# Altium PCB PCB.PcbDoc (part 2 of 2)
Units mil, origin at the board's own origin, x right, y up, seen from the top; angles counter-clockwise.
Board outline 2019.68 x 789.37 mil, 4 copper layers (Top Layer, Power Layer, GND Layer, Bottom Layer), stack 60.473 mil thick; 81 components, 59 nets, 315 pads, 114 vias.
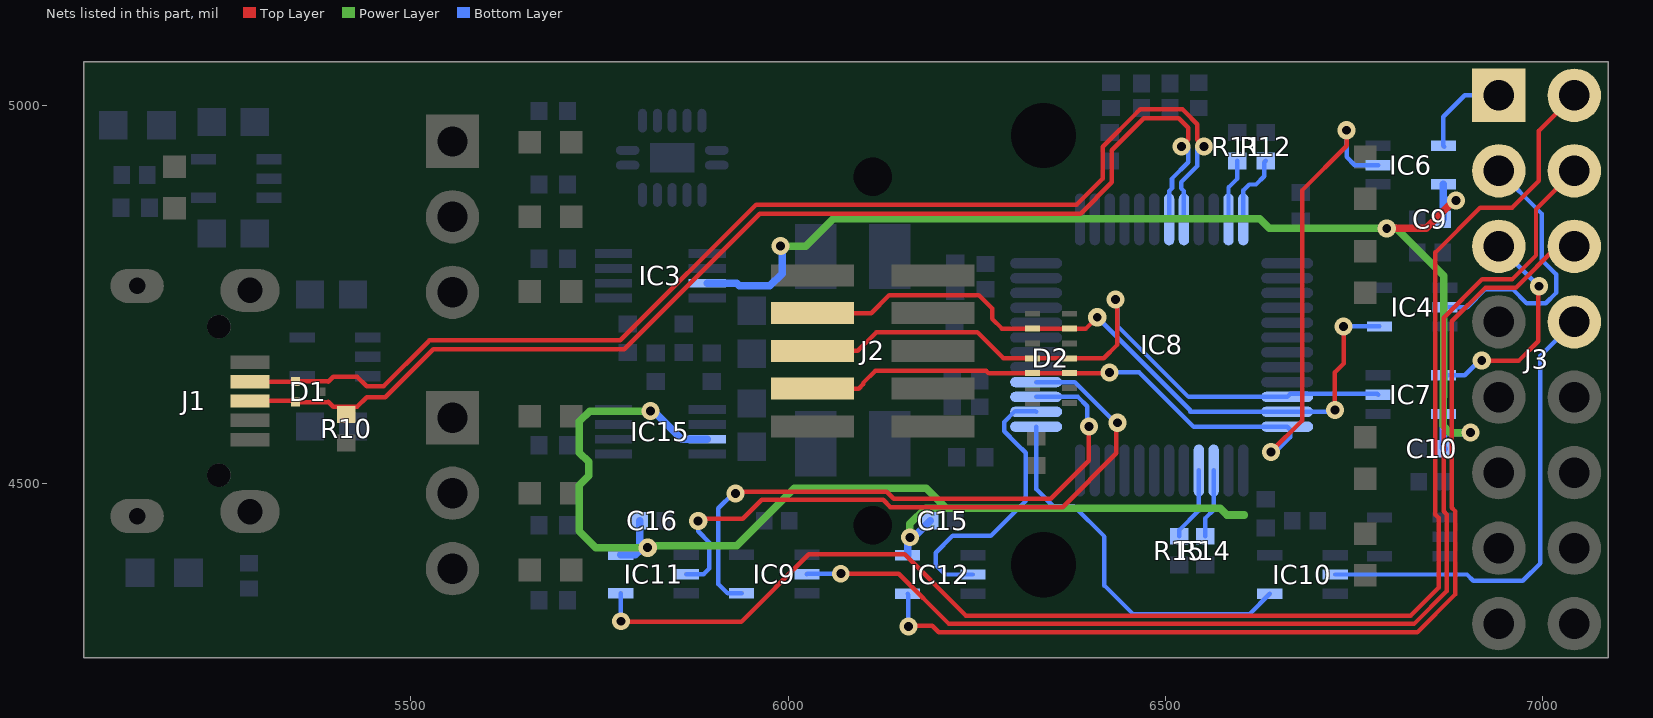
[diagram p4: the nets of this part, all layers, seen from the top]

## Via types
v1: diameter 24.02, hole 11.81, Top Layer to Bottom Layer, tented both sides, 100 vias
v2: diameter 24.02, hole 11.81, Top Layer to Bottom Layer, 11 vias
v3: diameter 23.62, hole 11.81, Top Layer to Bottom Layer, tented both sides, 3 vias

## Nets (pads, with @x,y where several pads share a name; then routed paths per layer and width w, separated by ;. In a path a pad name is that pad's centre, name@x,y a point inside that pad or via, vN(x,y) a via of type N, cw(c..) or ccw(c..) an arc to the next point about the centre after c; other vN are vias at no path point) (continued)
UART_1_RTS: D2.11 IC7.2 IC8.22 J2.6 | length 918.6
  Top Layer w5.91: J2.6@6032.2,4675.2 6092.52,4675.2 6117.13,4699.8 6250.98,4699.8 6285.43,4665.35 D2.11@6323.82,4665.35 6418.31,4665.35 6436.02,4683.07 6436.02,4741.14 v1(6434.06,4743.11)
  Bottom Layer w5.91: v1(6434.06,4743.11) 6436.02,4741.14 6436.02,4708.88 6530.73,4614.17 IC8.22@6661.42,4614.17 6665.35,4618.11 6780.81,4618.11 IC7.2@6781.81,4617.11
UART_1_RTS_T: IC7.4 J3.5 | length 285.6
  Top Layer w5.91: v1(6919.29,4662.4) 6968.5,4662.4 6994.09,4687.99 6994.09,4759.84 v1(6995.08,4760.83)
  Bottom Layer w5.91: IC7.4@6868.43,4642.7 6896.64,4642.7 v1@6913.39,4659.45 ; J3.5@6941.93,4813.78 6994.88,4760.83 v1(6995.08,4760.83)
UART_1_RXD: D2.9 IC4.4 IC8.23 J2.8 | length 961.4
  Top Layer w5.91: J2.8@6032.2,4725.2 6110.04,4725.2 6133.86,4749.02 6252.95,4749.02 6270.59,4731.38 6270.59,4717.52 6283.39,4704.72 D2.9@6323.82,4704.72 6394.77,4704.72 v1(6409.76,4719.72) ; v1(6724.74,4596.68) 6724.74,4593.83 6724.41,4593.5 6724.41,4646.65 6736.22,4658.46 v1(6736.22,4707.68)
  Bottom Layer w5.91: v1(6409.76,4719.72) 6533.13,4596.35 6533.13,4594.5 IC8.23@6661.42,4594.49 6722.44,4594.49 6723.43,4593.5 6724.41,4593.5 6724.74,4593.83 v1(6724.74,4596.68) ; v1(6736.22,4707.68) 6783.64,4707.68 IC4.4@6783.78,4707.53
UART_1_RXD_T: IC4.2 J3.3 | length 363.8
  Bottom Layer w5.91: IC4.2@6870.39,4733.12 6899.92,4733.12 6923.96,4757.17 6959.9,4757.17 6978.61,4738.45 7004.2,4738.45 7017.72,4751.97 7017.72,4776.64 6998.54,4795.81 6998.54,4857.17 J3.3@6941.93,4913.78
UART_1_RXLED: IC8.12 R12.1 | length 95
  Bottom Layer w5.91: IC8.12@6603.35,4849.41 6603.35,4887.8 6611.22,4895.67 6620.08,4895.67 6630.91,4906.5 6630.91,4925 R12.1@6632.87,4926.97
UART_1_TXD: D2.12 IC6.2 IC8.24 J2.4 | length 1269.6
  Top Layer w5.91: J2.4@6032.2,4625.2 6093.7,4625.2 6099.43,4630.93 6099.43,4632.51 6115.55,4648.62 6262.8,4648.62 6265.75,4645.67 D2.12@6323.82,4645.67 6425.2,4645.67 v1(6426.18,4646.65) ; v1(6639.76,4541.34) 6681.1,4582.68 6681.1,4887.8 6740.16,4946.85 v1(6740.16,4967.52)
  Bottom Layer w5.91: v1(6426.18,4646.65) 6465.55,4646.65 6537.4,4574.8 IC8.24@6661.42,4574.8 6665.35,4570.87 6665.35,4561.02 6645.67,4541.34 v1(6639.76,4541.34) ; v1(6740.16,4967.52) 6740.16,4932.2 6750.98,4921.38 IC6.2@6781.81,4921.38
UART_1_TXD_T: IC6.4 J3.1 | length 125.3
  Bottom Layer w5.91: IC6.4@6869.53,4945.87 IC6.4@6868.43,4946.97 6868.43,4985.55 6896.65,5013.78 J3.1@6941.93,5013.78
UART_1_TXLED: IC8.11 R11.1 | length 82.5
  Bottom Layer w5.91: IC8.11@6583.66,4849.41 6583.66,4891.73 6595.47,4903.54 R11.1@6595.47,4926.97
UART_2_CTS: IC8.37 IC10.4 | length 510.1
  Bottom Layer w5.91: IC8.37@6328.74,4574.8 6328.74,4492.13 6351.38,4469.49 6378.94,4469.49 6419.29,4429.13 6419.29,4364.17 6456.97,4326.5 6611.61,4326.5 IC10.4@6638.39,4353.27
UART_2_CTS_T: IC10.2 J3.8 | length 623.9
  Bottom Layer w5.91: IC10.2@6725,4378.86 6899.69,4378.86 6908.15,4370.39 6973.74,4370.39 6997.05,4393.7 6997.05,4668.9 J3.8@7041.93,4713.78
UART_2_RTS: IC8.38 IC12.2 | length 384.1
  Bottom Layer w5.91: IC12.2@6245,4378.86 6208.07,4378.86 6195.59,4391.34 6195.59,4407.87 6217.95,4430.24 6268.82,4430.24 6314.96,4476.38 6314.96,4540.04 6302.56,4552.44 6286.34,4568.66 6286.34,4580.95 6300.86,4595.47 6327.76,4595.47 IC8.38@6328.74,4594.49
UART_2_RTS_T: IC12.4 J3.6 | length 1361.3
  Top Layer w5.91: v1@6155.51,4308.07 v1@6156.5,4307.09 ; v1(6159.45,4310.04) 6160.43,4311.02 6190.94,4311.02 6199.49,4302.48 6834,4302.48 6883.86,4352.34 6883.86,4462.91 6879.65,4467.13 6879.65,4714.29 6924.21,4758.86 6964.57,4758.86 7019.49,4813.78 J3.6@7041.93,4813.78
  Bottom Layer w5.91: IC12.4@6158.39,4353.27 6159.45,4352.2 v1(6159.45,4310.04)
UART_2_RXD: IC8.39 IC9.4 | length 807.6
  Top Layer w5.91: v1(5930.12,4486.22) 5932.54,4488.64 6130.62,4488.64 6140.2,4479.06 6348.15,4479.06 6398.62,4529.53 v1(6398.62,4574.8)
  Bottom Layer w5.91: v1(5930.12,4486.22) 5927.17,4486.22 5907.48,4466.54 5907.48,4366.14 5919.8,4353.82 IC9.4@5938.39,4353.82 ; IC8.39@6328.74,4614.17 6384.18,4614.17 6396.65,4601.7 6396.65,4576.77 v1(6398.62,4574.8)
UART_2_RXD_T: IC9.2 J3.4 | length 1547.5
  Top Layer w5.91: v3(6069.88,4379.92) 6146.65,4379.92 6213.19,4313.39 6829.48,4313.39 6872.95,4356.86 6872.95,4458.4 6868.74,4462.61 6868.74,4719.13 6920,4770.39 6959.9,4770.39 6991.14,4801.64 6991.14,4862.99 J3.4@7041.93,4913.78
  Bottom Layer w5.91: IC9.2@6025,4379.41 6025.51,4379.92 v3(6069.88,4379.92)
UART_2_RXLED: IC8.28 R15.1 | length 97.8
  Bottom Layer w5.91: R15.1@6518.62,4429.53 6518.62,4437.91 6544.29,4463.58 IC8.28@6544.29,4516.73
UART_2_TXD: IC8.40 IC11.2 | length 870.4
  Top Layer w5.91: v1(5880.91,4449.8) 5883.86,4449.8 5886.81,4452.76 5939.96,4452.76 5964.94,4477.74 6126.1,4477.74 6135.69,4468.15 6363.82,4468.15 6435.04,4539.37 v1@6435.04,4575.13
  Bottom Layer w5.91: IC11.2@5865,4379.41 5888.27,4379.41 5895.67,4386.81 5895.67,4421.26 5880.91,4436.02 v1(5880.91,4449.8) ; IC8.40@6328.74,4633.86 6379.92,4633.86 6434.06,4579.72 v1@6434.06,4574.8
  other v1: 6436.34,4579.95
UART_2_TXD_T: IC11.4 J3.2 | length 1963.7
  Top Layer w5.91: v3@5776.57,4315.94 5937.99,4315.94 6027.56,4405.51 6154.53,4405.51 6235.75,4324.29 6824.96,4324.29 6862.05,4361.38 6862.05,4453.88 6857.83,4458.09 6857.83,4805.67 6917.32,4865.16 6959.65,4865.16 6995.08,4900.59 6995.08,4966.93 J3.2@7041.93,5013.78
  Bottom Layer w5.91: IC11.4@5778.39,4353.82 5778.54,4353.66 v3(5778.54,4316.93)
UART_2_TXLED: IC8.27 R14.1 | length 91.7
  Bottom Layer w5.91: R14.1@6553.07,4429.53 6553.07,4453.66 6563.98,4464.57 IC8.27@6563.98,4516.73
USB_D_N: D1.1 IC8.8 J1.2 | length 1597
  Top Layer w5.91: J1.2@5287.01,4634.41 5347.01,4634.41 D1.1@5347.44,4634.84 5371.63,4634.84 5371.71,4634.92 5390.11,4634.92 5390.62,4634.4 5397.24,4641.02 5428.86,4641.02 5441.54,4628.35
  Top Layer w6: 5441.54,4628.35 5463.98,4628.35 5521.65,4686.02 5524.8,4689.17 5777.75,4689.17 5957.68,4869.09 6382.69,4869.09 6417.13,4903.54 6417.13,4945.92 6462.97,4991.75 6466.49,4995.27 6522.69,4995.27 6526.2,4991.75 6542.32,4975.63 6542.32,4954.87 v2(6551.33,4945.87)
  Bottom Layer w6: IC8.8@6524.61,4849.41 6524.61,4887.05 6520.76,4890.89 6520.76,4898.62 6542.32,4920.18 6542.32,4943.9 6544.29,4945.87 v2(6551.33,4945.87)
USB_D_P: D1.2 IC8.7 J1.3 R10.1 | length 1578.6
  Top Layer w5.91: J1.3@5287.01,4608.82 5345.91,4608.82 D1.2@5347.44,4607.28 5371.63,4607.28 5371.71,4607.2 5390.11,4607.2 5390.62,4607.72 5397.24,4601.1 5428.86,4601.1 5441.54,4613.78
  Top Layer w6: 5441.54,4613.78 5466.38,4613.78 5529.77,4677.17 5782.72,4677.17 5962.65,4857.09 6387.66,4857.09 6429.13,4898.57 6429.13,4940.94 6471.46,4983.27 6517.72,4983.27 6530.32,4970.66 6530.32,4954.87 v2(6521.31,4945.87)
  Bottom Layer w6: IC8.7@6504.92,4849.41 6504.92,4887.05 6508.76,4890.89 6508.76,4903.59 6530.32,4925.15 6530.32,4943.9 6528.35,4945.87 v2(6521.31,4945.87)
VCCIOA: C9.2 C10.2 IC3.7 IC6.5 IC7.5 | length 1585.6
  Top Layer w10: v2(6793.31,4837.6) 6845.47,4837.6 v1@6882.87,4875
  Power Layer w10: v1(5990.16,4813.98) 6023.62,4813.98 6060.04,4850.39 6625,4850.39 6637.8,4837.6 6654.53,4837.6 v2(6793.31,4837.6) 6806.1,4837.6 6869.09,4774.61 6869.09,4634.84 ; 6869.09,4614.17 6869.09,4634.84 ; v1(6904.53,4566.93) 6876.97,4566.93 6868.11,4575.79 6868.11,4633.86 6869.09,4634.84
  Bottom Layer w10: IC3.7@5892.87,4764.76 5931.73,4764.76 5935.04,4761.46 5976.02,4761.46 5992.13,4777.56 5992.13,4812.01 v1(5990.16,4813.98) ; C9.2@6867.44,4849.53 6868.43,4850.51 6868.43,4872.05 ; IC7.5@6868.43,4591.52 6868.43,4566.93 ; IC6.5@6868.43,4895.79 6868.43,4872.05 ; C10.2@6869.41,4545.59 6868.43,4546.58 6868.43,4566.93 ; v1(6885.18,4874.25) 6886.06,4874.25 6886.81,4875 6871.38,4875 6868.43,4872.05 ; v1(6904.53,4566.93) 6868.43,4566.93
VCCIOB: C15.2 C16.2 IC11.5 IC12.5 IC15.7 | length 1482.8
  Power Layer w10: v1(5817.91,4595.47) 5737.2,4595.47 5723.43,4581.69 5723.43,4540.48 5735.87,4528.04 5735.87,4509.81 5723.43,4497.36 5723.43,4436.02 5745.08,4414.37 v1(5813.98,4414.37) 5816.34,4416.73 5932.09,4416.73 6008.46,4493.11 6183.07,4493.11 6209.49,4466.69 ; v3(6161.42,4428.15) 6161.42,4445.87 6182.24,4466.69 6209.49,4466.69 ; 6604.33,4457.68 6581.69,4457.68 6572.68,4466.69 6209.49,4466.69
  Bottom Layer w10: IC11.5@5778.39,4405 5797.72,4405 5803.27,4410.55 C16.2@5803.27,4450 ; v1(5817.91,4595.47) 5821.85,4595.47 5859.25,4558.07 IC15.7@5892.87,4558.07 ; IC12.5@6158.39,4404.45 6158.39,4420.12 C15.2@6188.27,4450
pads on no net: IC1.4 IC2.4 IC8.1 IC8.13 IC8.15 IC8.16 IC8.17 IC8.20 IC8.29 IC8.30 IC8.32 IC8.33 IC8.35 IC8.36 IC8.41 IC8.48 IC13.8 IC13.11 J1. J1.4 J2.0 J2.7 Y1.2 Y1.4

## Polygon pours and split planes (outlines as drawn)
GND on GND Layer "GND" (solid, pour order 27): 5066.93,5058.07 7086.61,5058.07 7086.61,4268.7 5066.93,4268.7
5V_USB on Power Layer "5V_USB" (solid, pour order 40): 7085.63,5059.06 7085.63,4563.49 7080.22,4568.9 6940.94,4568.9 6940.94,4569.43 6906.83,4603.55 6906.83,4750.65 6798.76,4858.72 5966.99,4858.72 5926.18,4817.91 5931.59,4812.5 5931.59,4791.34 6829.72,4791.34 6830.71,4790.35 6829.72,4789.37 6829.72,4701.77 6783.46,4655.51 6783.46,4595.47 6728.35,4540.35 6676.99,4540.35 6633.69,4497.05 6274.61,4497.05 6249.98,4501.97 5912.4,4501.97 5911.42,4502.95 5874.29,4465.83 5743.82,4465.83 5733.62,4476.02 5733.62,4491.04 5747.05,4504.46 5747.05,4562.01 5752.95,4567.91 5819.88,4567.91 5837.6,4585.63 5837.6,4616.64 5832.19,4622.05 5821.85,4611.71 5508.36,4611.71 5493.52,4596.86 5493.52,4386.45 5458.36,4351.3 5456.06,4353.6 5307.8,4353.6 5307.8,4378.66 5385.83,4456.69 5385.83,4796.02 5461.61,4871.81 5461.61,4872.05 5566.34,4872.05 5594.89,4843.49 5598.35,4846.95 5641.46,4846.95 5651.57,4857.06 5651.57,4885.83 5613.19,4924.21 5453.85,4924.21 5453.85,4929.03 5438.98,4943.9 5410.43,4943.9 5305.12,4838.58 5305.12,4673.23 5166.34,4534.45 5166.34,4269.69 5067.91,4269.69 5066.93,4268.7 5066.93,5058.07 7086.61,5058.07 7086.21,5057.66 7086.21,4568.9
3V3_FT on Power Layer "3V3_FT" (solid, pour order 34): 7086.21,4568.9 6940.94,4568.9 6907.75,4602.1 6907.75,4602.63 6848.69,4602.63 6848.43,4602.36 6848.43,4653.54 6849.41,4653.54 6870.08,4674.21 6870.08,4750.98 6829.72,4791.34 6778.54,4791.34 6758.86,4770.67 6758.86,4747.05 6777.56,4728.35 6831.69,4728.35 6831.69,4703.74 6783.46,4655.51 6783.46,4595.47 6728.35,4540.35 6676.99,4540.35 6625,4488.36 6625,4450.44 6610.93,4436.38 6207.05,4436.38 6176.18,4405.51 5735.24,4405.51 5699.8,4440.94 5489.17,4440.94 5484.25,4436.02 5484.25,4390.75 5453.74,4360.24 5323.82,4360.24 5323.82,4392.72 5322.83,4393.7 5385.83,4456.69 5385.83,4796.26 5461.61,4872.05 5555.49,4872.05 5598.43,4829.12 5608.27,4838.96 5642.11,4838.96 5651.57,4848.43 5651.57,4885.83 5613.19,4924.21 5451.77,4924.21 5451.77,4919.29 5345.47,4812.99 5346.46,4654.53 5339.57,4646.65 5222.44,4529.53 5222.44,4384.84 5300.2,4307.09 5701.77,4307.09 5753.94,4359.25 5937.01,4359.25 5953.74,4343.5 6211.61,4343.5 6246.06,4309.06 6798.23,4309.06 6953.74,4464.57 7085.63,4464.57 7085.63,4568.32
1V8 on Power Layer "1V8" (solid, pour order 37): 7085.63,4464.57 7084.65,4465.55 6954.72,4465.55 6800.55,4311.38 6243.74,4311.38 6208.66,4346.46 6126.97,4346.46 6121.06,4343.5 5952.76,4343.5 5937.01,4359.25 5936.02,4358.27 5751.33,4358.27 5700.15,4307.09 5301.82,4307.09 5301.82,4307.68 5222.44,4387.06 5222.44,4529.53 5228.35,4529.53 5346.57,4647.76 5346.57,4814.09 5451.77,4919.29 5451.77,4931.1 5438.98,4943.9 5410.43,4943.9 5305.12,4838.58 5305.12,4673.23 5166.34,4534.45 5166.34,4268.7 7086.61,4268.7 7085.63,4269.69
VCCIOB on Power Layer "VCCIOB" (solid, pour order 31): 6618.11,4493.11 6625,4486.22 6625,4474.41 6625,4446.85 6618.11,4439.96 6611.22,4433.07 6203.74,4433.07 6184.06,4413.39 6176.18,4405.51 5744.09,4405.51 5735.24,4405.51 5716.54,4424.21 5714.57,4426.18 5526.57,4426.18 5515.75,4426.18 5508.86,4433.07 5500.98,4440.94 5500.98,4595.47 5500.98,4604.33 5514.76,4618.11 5518.7,4622.05 5833.66,4622.05 5835.18,4622.05 5837.6,4619.63 5837.6,4585.63 5819.88,4567.91 5752.95,4567.91 5747.05,4562.01 5745.66,4560.62 5745.66,4504.92 5745.66,4503.08 5733.62,4491.04 5733.62,4478.55 5733.62,4476.02 5742.13,4467.52 5743.82,4465.83 5873.74,4465.83 5874.29,4465.83 5909.72,4501.26 5911.42,4502.95 6288.39,4502.95 6608.27,4502.95 6612.2,4499.02 6624.02,4487.2
VCCIOA on Power Layer "VCCIOA" (solid, pour order 28): 6916.52,4554.67 6844.49,4554.13 6843.01,4653.54 6852.36,4662.4 6858.9,4670.69 6858.9,4701.77 6858.02,4759.31 6839.04,4777.64 6838.05,4778.8 5928.42,4778.8 5926.18,4781.44 5926.18,4810.32 5967.36,4858.72 6806.8,4858.72 6916.79,4729.46 6916.79,4554.98
no net on Top Layer "AntmicroLogo" (solid, pour order 32): 6510.04,4547.03 6501.81,4545.41 6496.54,4546.1 6492.09,4548.06 6488.39,4551.21 6485.37,4555.42 6482.97,4560.57 6481.12,4566.57 6479.76,4573.3 6478.83,4580.64 6474.98,4580.64 6471.96,4580.42 6469.38,4579.77 6467.23,4578.7 6465.5,4577.21 6464.17,4575.31 6463.23,4573.01 6462.68,4570.31 6462.5,4567.23 6463.61,4558.91 6466.47,4551.48 6460.17,4549.03 6456.89,4558.02 6455.62,4568.16 6456.84,4577.36 6460.57,4584.3 6466.94,4588.68 6476.03,4590.21 6516.39,4590.21 6519.61,4581.04 6520.82,4569.33 6519.61,4559.24 6516,4551.73
no net on Top Layer "AntmicroLogo" (solid, pour order 33): 6519.65,4614.26 6464.25,4614.26 6462.67,4619.42 6462.14,4625.35 6463.02,4631.89 6465.66,4636.26 6470.07,4638.7 6476.26,4639.47 6519.65,4639.47 6519.65,4649.73 6476.26,4649.73 6467.43,4648.3 6460.95,4643.88 6456.97,4636.29 6455.62,4625.35 6456.83,4613.93 6460.05,4604.01 6519.65,4604.01
no net on Top Layer "AntmicroLogo" (solid, pour order 35): 6516.2,4668.01 6511.23,4664.94 6504.37,4663.85 6463.2,4663.85 6463.2,4656.62 6456.78,4656.62 6456.78,4663.85 6442.32,4663.85 6439.17,4674.12 6456.78,4674.12 6456.78,4685.08 6463.2,4685.08 6463.2,4674.12 6504.37,4674.12 6508.05,4674.61 6510.8,4676.1 6512.52,4678.54 6513.12,4681.93 6512.65,4685.08 6519.19,4685.08 6519.98,4682.3 6520.24,4678.9 6519.22,4672.76
no net on Top Layer "AntmicroLogo" (solid, pour order 36): 6519.74,4704.79 ccw(c6519.65,4704.79) 6519.65,4704.88 6464.32,4704.88 6462.72,4710.21 6462.24,4716.57 6462.45,4719.8 6463.09,4722.55 6464.12,4724.82 6465.51,4726.65 6467.23,4728.03 6469.27,4729.01 6471.59,4729.58 6474.17,4729.77 6519.65,4729.77 ccw(c6519.65,4729.86) 6519.74,4729.86 6519.74,4740.01 ccw(c6519.65,4740.01) 6519.65,4740.11 6468.14,4740.11 6465.71,4742.54 6463.85,4745.39 6462.65,4748.63 6462.24,4752.26 6462.48,4755.45 6463.2,4758.13 6464.36,4760.35 6465.93,4762.12 6467.88,4763.46 6470.2,4764.39 6472.85,4764.93 6475.8,4765.11 6475.81,4765.11 6475.8,4765.11 6519.65,4765.11 ccw(c6519.65,4765.21) 6519.75,4765.21 6519.75,4775.35 ccw(c6519.65,4775.35) 6519.65,4775.45 6475.92,4775.45 ccw(c6475.92,4775.35) 6475.9,4775.45 6467.66,4774.15 ccw(c6467.67,4774.06) 6467.62,4774.14 ccw(c6467.67,4774.06) 6467.62,4774.14 6461.21,4770.13 ccw(c6461.26,4770.05) 6461.21,4770.13 ccw(c6461.26,4770.05) 6461.18,4770.1 ccw(c6461.26,4770.05) 6461.18,4770.1 6457.02,4763.21 6457.02,4763.2 cw(c6457.1,4763.16) 6457.02,4763.21 6457.02,4763.2 ccw(c6457.1,4763.16) 6457.01,4763.17 6455.53,4753.21 ccw(c6455.62,4753.2) 6455.53,4753.19 ccw(c6455.62,4753.2) 6455.53,4753.19 6456.03,4747.8 cw(c6456.13,4747.81) 6456.03,4747.8 ccw(c6456.13,4747.81) 6456.04,4747.78 6457.49,4742.9 ccw(c6457.58,4742.93) 6457.5,4742.88 6459.81,4738.61 ccw(c6459.9,4738.66) 6459.82,4738.6 ccw(c6459.9,4738.66) 6459.82,4738.59 6459.82,4738.6 6459.82,4738.59 6462.83,4735.12 6459.73,4731.83 cw(c6459.8,4731.76) 6459.73,4731.83 ccw(c6459.8,4731.76) 6459.72,4731.81 ccw(c6459.8,4731.76) 6459.72,4731.81 cw(c6459.8,4731.76) 6459.73,4731.83 6459.72,4731.81 6457.42,4727.72 ccw(c6457.5,4727.67) 6457.42,4727.72 ccw(c6457.5,4727.67) 6457.41,4727.7 6456,4722.61 ccw(c6456.09,4722.58) 6456,4722.59 ccw(c6456.09,4722.58) 6456,4722.59 6455.53,4716.22 cw(c6455.62,4716.22) 6455.53,4716.22 ccw(c6455.62,4716.22) 6455.53,4716.21 6456.73,4704.5 ccw(c6456.83,4704.51) 6456.74,4704.48 6459.96,4694.61 ccw(c6460.05,4694.64) 6460.05,4694.54 6519.65,4694.54 ccw(c6519.65,4694.64) 6519.74,4694.64 6519.74,4704.79 cw(c6329.91,4141.03)
no net on Top Layer "AntmicroLogo" (solid, pour order 38): 6519.65,4789.26 6519.65,4799.52 6456.78,4799.52 6456.78,4789.26
no net on Top Layer "AntmicroLogo" (solid, pour order 39): 6506.95,4812.78 6501.38,4810.74 6495.09,4809.49 6488.16,4809.07 6481.24,4809.5 6474.95,4810.76 6469.4,4812.81 6464.67,4815.62 6460.84,4819.12 6458,4823.29 6456.23,4828.08 6455.62,4833.45 6456.7,4841.42 6459.69,4847.56 6465.77,4845.12 6464.49,4843.06 6463.49,4840.64 6462.84,4837.98 6462.61,4835.2 6464.53,4828.52 6469.84,4823.62 6477.87,4820.6 6487.93,4819.58 6497.9,4820.62 6505.98,4823.66 6511.39,4828.57 6513.36,4835.2 6513.14,4837.96 6512.54,4840.58 6511.59,4842.95 6510.33,4844.99 6516.74,4847.57 6519.74,4841.42 6520.82,4833.45 6520.21,4828.05 6518.43,4823.24 6515.56,4819.07 6511.71,4815.57
no net on Top Layer "AntmicroLogo" (solid, pour order 41): 6519.65,4857.47 6460.05,4857.47 6456.83,4866.84 6455.62,4878.93 6455.75,4882.33 6455.96,4884.41 6463.66,4882.08 6462.87,4879.05 6462.61,4875.67 6462.99,4871.48 6464.25,4867.73 6519.65,4867.73
no net on Top Layer "AntmicroLogo" (solid, pour order 42): 6506.8,4889.25 6511.58,4891.91 6515.47,4895.37 6518.38,4899.66 6520.19,4904.76 6520.82,4910.72 6520.19,4916.68 6518.38,4921.79 6515.47,4926.07 6511.58,4929.53 6506.8,4932.2 6501.24,4934.08 6494.99,4935.2 6488.16,4935.57 6481.37,4935.2 6475.15,4934.08 6469.61,4932.2 6464.85,4929.53 6460.96,4926.07 6458.06,4921.79 6456.25,4916.68 6455.62,4910.72 6456.25,4904.76 6458.06,4899.66 6460.96,4895.37 6464.85,4891.91 6469.61,4889.25 6475.15,4887.36 6481.37,4886.24 6488.16,4885.88 6494.99,4886.24 6501.24,4887.36
no net on Top Layer "AntmicroLogo" (solid, pour order 30): 205 vertices, not listed, extent 6046.31,4146.92 6524.67,4475.68
no net on Top Layer "AntmicroLogo" (solid, pour order 29): 319 vertices, not listed, extent 6397.49,4368.12 6577.93,4525.66
no net on Top Solder "AntmicroLogo" (solid, pour order 10): 6510.04,4547.03 6501.81,4545.41 6496.54,4546.1 6492.09,4548.06 6488.39,4551.21 6485.37,4555.42 6482.97,4560.57 6481.12,4566.57 6479.76,4573.3 6478.83,4580.64 6474.98,4580.64 6471.96,4580.42 6469.38,4579.77 6467.23,4578.7 6465.5,4577.21 6464.17,4575.31 6463.23,4573.01 6462.68,4570.31 6462.5,4567.23 6463.61,4558.91 6466.47,4551.48 6460.17,4549.03 6456.89,4558.02 6455.62,4568.16 6456.84,4577.36 6460.57,4584.3 6466.94,4588.68 6476.03,4590.21 6516.39,4590.21 6519.61,4581.04 6520.82,4569.33 6519.61,4559.24 6516,4551.73
no net on Top Solder "AntmicroLogo" (solid, pour order 12): 6519.65,4614.26 6464.25,4614.26 6462.67,4619.42 6462.14,4625.35 6463.02,4631.89 6465.66,4636.26 6470.07,4638.7 6476.26,4639.47 6519.65,4639.47 6519.65,4649.73 6476.26,4649.73 6467.43,4648.3 6460.95,4643.88 6456.97,4636.29 6455.62,4625.35 6456.83,4613.93 6460.05,4604.01 6519.65,4604.01
no net on Top Solder "AntmicroLogo" (solid, pour order 12): 6516.2,4668.01 6511.23,4664.94 6504.37,4663.85 6463.2,4663.85 6463.2,4656.62 6456.78,4656.62 6456.78,4663.85 6442.32,4663.85 6439.17,4674.12 6456.78,4674.12 6456.78,4685.08 6463.2,4685.08 6463.2,4674.12 6504.37,4674.12 6508.05,4674.61 6510.8,4676.1 6512.52,4678.54 6513.12,4681.93 6512.65,4685.08 6519.19,4685.08 6519.98,4682.3 6520.24,4678.9 6519.22,4672.76
no net on Top Solder "AntmicroLogo" (solid, pour order 14): 6519.74,4704.79 ccw(c6519.65,4704.79) 6519.65,4704.88 6464.32,4704.88 6462.72,4710.21 6462.24,4716.57 6462.45,4719.8 6463.09,4722.55 6464.12,4724.82 6465.51,4726.65 6467.23,4728.03 6469.27,4729.01 6471.59,4729.58 6474.17,4729.77 6519.65,4729.77 ccw(c6519.65,4729.86) 6519.74,4729.86 6519.74,4740.01 ccw(c6519.65,4740.01) 6519.65,4740.11 6468.14,4740.11 6465.71,4742.54 6463.85,4745.39 6462.65,4748.63 6462.24,4752.26 6462.48,4755.45 6463.2,4758.13 6464.36,4760.35 6465.93,4762.12 6467.88,4763.46 6470.2,4764.39 6472.85,4764.93 6475.8,4765.11 6475.81,4765.11 6475.8,4765.11 6519.65,4765.11 ccw(c6519.65,4765.21) 6519.75,4765.21 6519.75,4775.35 ccw(c6519.65,4775.35) 6519.65,4775.45 6475.92,4775.45 ccw(c6475.92,4775.35) 6475.9,4775.45 6467.66,4774.15 ccw(c6467.67,4774.06) 6467.62,4774.14 ccw(c6467.67,4774.06) 6467.62,4774.14 6461.21,4770.13 ccw(c6461.26,4770.05) 6461.21,4770.13 ccw(c6461.26,4770.05) 6461.18,4770.1 ccw(c6461.26,4770.05) 6461.18,4770.1 6457.02,4763.21 6457.02,4763.2 cw(c6457.1,4763.16) 6457.02,4763.21 6457.02,4763.2 ccw(c6457.1,4763.16) 6457.01,4763.17 6455.53,4753.21 ccw(c6455.62,4753.2) 6455.53,4753.19 ccw(c6455.62,4753.2) 6455.53,4753.19 6456.03,4747.8 cw(c6456.13,4747.81) 6456.03,4747.8 ccw(c6456.13,4747.81) 6456.04,4747.78 6457.49,4742.9 ccw(c6457.58,4742.93) 6457.5,4742.88 6459.81,4738.61 ccw(c6459.9,4738.66) 6459.82,4738.6 ccw(c6459.9,4738.66) 6459.82,4738.59 6459.82,4738.6 6459.82,4738.59 6462.83,4735.12 6459.73,4731.83 cw(c6459.8,4731.76) 6459.73,4731.83 ccw(c6459.8,4731.76) 6459.72,4731.81 ccw(c6459.8,4731.76) 6459.72,4731.81 cw(c6459.8,4731.76) 6459.73,4731.83 6459.72,4731.81 6457.42,4727.72 ccw(c6457.5,4727.67) 6457.42,4727.72 ccw(c6457.5,4727.67) 6457.41,4727.7 6456,4722.61 ccw(c6456.09,4722.58) 6456,4722.59 ccw(c6456.09,4722.58) 6456,4722.59 6455.53,4716.22 cw(c6455.62,4716.22) 6455.53,4716.22 ccw(c6455.62,4716.22) 6455.53,4716.21 6456.73,4704.5 ccw(c6456.83,4704.51) 6456.74,4704.48 6459.96,4694.61 ccw(c6460.05,4694.64) 6460.05,4694.54 6519.65,4694.54 ccw(c6519.65,4694.64) 6519.74,4694.64 6519.74,4704.79 cw(c6329.91,4141.03)
no net on Top Solder "AntmicroLogo" (solid, pour order 14): 6519.65,4789.26 6519.65,4799.52 6456.78,4799.52 6456.78,4789.26
no net on Top Solder "AntmicroLogo" (solid, pour order 16): 6506.95,4812.78 6501.38,4810.74 6495.09,4809.49 6488.16,4809.07 6481.24,4809.5 6474.95,4810.76 6469.4,4812.81 6464.67,4815.62 6460.84,4819.12 6458,4823.29 6456.23,4828.08 6455.62,4833.45 6456.7,4841.42 6459.69,4847.56 6465.77,4845.12 6464.49,4843.06 6463.49,4840.64 6462.84,4837.98 6462.61,4835.2 6464.53,4828.52 6469.84,4823.62 6477.87,4820.6 6487.93,4819.58 6497.9,4820.62 6505.98,4823.66 6511.39,4828.57 6513.36,4835.2 6513.14,4837.96 6512.54,4840.58 6511.59,4842.95 6510.33,4844.99 6516.74,4847.57 6519.74,4841.42 6520.82,4833.45 6520.21,4828.05 6518.43,4823.24 6515.56,4819.07 6511.71,4815.57
no net on Top Solder "AntmicroLogo" (solid, pour order 18): 6519.65,4857.47 6460.05,4857.47 6456.83,4866.84 6455.62,4878.93 6455.75,4882.33 6455.96,4884.41 6463.66,4882.08 6462.87,4879.05 6462.61,4875.67 6462.99,4871.48 6464.25,4867.73 6519.65,4867.73
no net on Top Solder "AntmicroLogo" (solid, pour order 23): 6506.8,4889.25 6511.58,4891.91 6515.47,4895.37 6518.38,4899.66 6520.19,4904.76 6520.82,4910.72 6520.19,4916.68 6518.38,4921.79 6515.47,4926.07 6511.58,4929.53 6506.8,4932.2 6501.24,4934.08 6494.99,4935.2 6488.16,4935.57 6481.37,4935.2 6475.15,4934.08 6469.61,4932.2 6464.85,4929.53 6460.96,4926.07 6458.06,4921.79 6456.25,4916.68 6455.62,4910.72 6456.25,4904.76 6458.06,4899.66 6460.96,4895.37 6464.85,4891.91 6469.61,4889.25 6475.15,4887.36 6481.37,4886.24 6488.16,4885.88 6494.99,4886.24 6501.24,4887.36
no net on Top Solder "AntmicroLogo" (solid, pour order 10): 205 vertices, not listed, extent 6046.31,4146.92 6524.67,4475.68
no net on Top Solder "AntmicroLogo" (solid, pour order 9): 319 vertices, not listed, extent 6397.49,4368.12 6577.93,4525.66

## Other copper
Top Layer:
  pour cut-out: 6502.31,4897.86 6497.9,4896.87 6493.06,4896.31 6487.93,4896.14 6482.8,4896.31 6477.99,4896.87 6473.62,4897.86 6469.78,4899.32 6466.61,4901.29 6464.2,4903.82 6462.67,4906.95 6462.14,4910.72 6462.67,4914.5 6464.2,4917.63 6466.61,4920.16 6469.78,4922.13 6473.62,4923.58 6477.99,4924.57 6482.8,4925.13 6487.93,4925.31 6493.06,4925.13 6497.9,4924.57 6502.31,4923.58 6506.18,4922.13 6509.4,4920.16 6511.84,4917.63 6513.39,4914.5 6513.94,4910.72 6513.39,4906.95 6511.84,4903.82 6509.4,4901.29 6506.18,4899.32
  pour cut-out: 6507.24,4556.18 6501.57,4555.21 6494.45,4556.94 6489.43,4561.93 6486.13,4569.92 6484.19,4580.64 6512.77,4580.64 6513.63,4578.54 6514.3,4576.02 6514.72,4573.21 6514.87,4570.26 6513.99,4563.77 6511.42,4559.06
  pour cut-out: 6508.59,4464.89 ccw(c6508.59,4467.39) 6511.08,4467.39 ccw(c6508.59,4467.39) 6508.59,4469.88 ccw(c6508.59,4467.39) 6506.09,4467.39 ccw(c6508.59,4467.39) 6508.59,4464.89 cw(c6092.51,4152.09)
  pour cut-out: 6522.28,4446.89 cw(c6517.4,4446.89) 6517.4,4442 cw(c6517.4,4446.89) 6512.51,4446.89 cw(c6517.4,4446.89) 6517.4,4451.77 cw(c6517.4,4446.89) 6522.28,4446.89 cw(c6072.01,4143.28)
  pour cut-out: 6511.08,4426.39 cw(c6508.59,4426.39) 6508.59,4423.9 cw(c6508.59,4426.39) 6506.09,4426.39 cw(c6508.59,4426.39) 6508.59,4428.89 cw(c6508.59,4426.39) 6511.08,4426.39 cw(c6051.51,4152.09)
  pour cut-out: 6490.2,4423.29 cw(c6487.71,4423.29) 6487.71,4420.79 cw(c6487.71,4423.29) 6485.21,4423.29 cw(c6487.71,4423.29) 6487.71,4425.78 cw(c6487.71,4423.29) 6490.2,4423.29 cw(c6048.4,4172.97)
  pour cut-out: 6469.32,4426.39 cw(c6466.83,4426.39) 6466.83,4423.9 cw(c6466.83,4426.39) 6464.34,4426.39 cw(c6466.83,4426.39) 6466.83,4428.89 cw(c6466.83,4426.39) 6469.32,4426.39 cw(c6051.51,4193.85)
  pour cut-out: 6462.91,4446.89 cw(c6458.02,4446.89) 6458.02,4442 cw(c6458.02,4446.89) 6453.14,4446.89 cw(c6458.02,4446.89) 6458.02,4451.77 cw(c6458.02,4446.89) 6462.91,4446.89 cw(c6072.01,4202.66)
  pour cut-out: 6469.32,4467.39 cw(c6466.83,4467.39) 6466.83,4464.89 cw(c6466.83,4467.39) 6464.34,4467.39 cw(c6466.83,4467.39) 6466.83,4469.88 cw(c6466.83,4467.39) 6469.32,4467.39 cw(c6092.51,4193.85)
  pour cut-out: 6490.2,4470.49 cw(c6487.71,4470.49) 6487.71,4467.99 cw(c6487.71,4470.49) 6485.21,4470.49 cw(c6487.71,4470.49) 6487.71,4472.98 cw(c6487.71,4470.49) 6490.2,4470.49 cw(c6095.61,4172.97)
  text ".AM_Title" at 6570.87,4547.24 h60 r90
  text "Rev. 1.1    03/2019" at 6614.17,4547.24 h60 r90

## Silkscreen, mask and mechanical layers (free items; w line width, h text height)
Top Overlay:
  lines w5.91: 6786.42,4972.44 6786.42,5005.91 ; 6886.42,4971.46 6886.42,5004.92
  text "A" at 6775.98,5016.73 h30
  text "B" at 6875.98,5015.75 h30
  text "JTAG" at 6062.01,4979.33 h30
  text "3V3" at 5485.24,4925.2 h30 r90
  text "TX" at 6841.01,4901.57 h30
  text "RX" at 6841.01,4822.83 h30
  text "5V0" at 5487.2,4812.01 h30 r90
  text "CH A" at 5442.91,4800.2 h60 r90
  text "RTS" at 6811.02,4744.09 h30
  text "1V8" at 5487.2,4706.69 h30 r90
  text "CTS" at 6811.02,4665.35 h30
  text "5V0" at 6811.02,4586.61 h30
  text "3V3" at 5486.22,4556.1 h30 r90
  text "3V3" at 6811.02,4507.87 h30
  text "5V0" at 5488.19,4445.87 h30 r90
  text "1V8" at 6811.02,4429.13 h30
  text "GND" at 6811.02,4350.39 h30
  text "1V8" at 5488.19,4335.63 h30 r90
  text "CH B" at 5442.91,4307.09 h60 r90
Bottom Overlay:
  lines w7: 6077.34,4863.08 6083.17,4868.9 6083.17,4937.5 6092.52,4946.85 6093.5,4946.85 ; 6274.61,4626.97 6274.61,4580.71 6295.98,4559.34 6357.86,4559.34 ; 6409.45,5034.45 6377.95,5034.45 6221.46,5034.45 6221.46,4959.65 6208.66,4946.85 6093.5,4946.85 ; 6093.5,4946.85 6093.5,4946.85
Top Solder:
  pour cut-out: 6502.31,4897.86 6497.9,4896.87 6493.06,4896.31 6487.93,4896.14 6482.8,4896.31 6477.99,4896.87 6473.62,4897.86 6469.78,4899.32 6466.61,4901.29 6464.2,4903.82 6462.67,4906.95 6462.14,4910.72 6462.67,4914.5 6464.2,4917.63 6466.61,4920.16 6469.78,4922.13 6473.62,4923.58 6477.99,4924.57 6482.8,4925.13 6487.93,4925.31 6493.06,4925.13 6497.9,4924.57 6502.31,4923.58 6506.18,4922.13 6509.4,4920.16 6511.84,4917.63 6513.39,4914.5 6513.94,4910.72 6513.39,4906.95 6511.84,4903.82 6509.4,4901.29 6506.18,4899.32
  pour cut-out: 6507.24,4556.18 6501.57,4555.21 6494.45,4556.94 6489.43,4561.93 6486.13,4569.92 6484.19,4580.64 6512.77,4580.64 6513.63,4578.54 6514.3,4576.02 6514.72,4573.21 6514.87,4570.26 6513.99,4563.77 6511.42,4559.06
  pour cut-out: 6508.59,4464.89 ccw(c6508.59,4467.39) 6511.08,4467.39 ccw(c6508.59,4467.39) 6508.59,4469.88 ccw(c6508.59,4467.39) 6506.09,4467.39 ccw(c6508.59,4467.39) 6508.59,4464.89 cw(c6092.51,4152.09)
  pour cut-out: 6522.28,4446.89 cw(c6517.4,4446.89) 6517.4,4442 cw(c6517.4,4446.89) 6512.51,4446.89 cw(c6517.4,4446.89) 6517.4,4451.77 cw(c6517.4,4446.89) 6522.28,4446.89 cw(c6072.01,4143.28)
  pour cut-out: 6511.08,4426.39 cw(c6508.59,4426.39) 6508.59,4423.9 cw(c6508.59,4426.39) 6506.09,4426.39 cw(c6508.59,4426.39) 6508.59,4428.89 cw(c6508.59,4426.39) 6511.08,4426.39 cw(c6051.51,4152.09)
  pour cut-out: 6490.2,4423.29 cw(c6487.71,4423.29) 6487.71,4420.79 cw(c6487.71,4423.29) 6485.21,4423.29 cw(c6487.71,4423.29) 6487.71,4425.78 cw(c6487.71,4423.29) 6490.2,4423.29 cw(c6048.4,4172.97)
  pour cut-out: 6469.32,4426.39 cw(c6466.83,4426.39) 6466.83,4423.9 cw(c6466.83,4426.39) 6464.34,4426.39 cw(c6466.83,4426.39) 6466.83,4428.89 cw(c6466.83,4426.39) 6469.32,4426.39 cw(c6051.51,4193.85)
  pour cut-out: 6462.91,4446.89 cw(c6458.02,4446.89) 6458.02,4442 cw(c6458.02,4446.89) 6453.14,4446.89 cw(c6458.02,4446.89) 6458.02,4451.77 cw(c6458.02,4446.89) 6462.91,4446.89 cw(c6072.01,4202.66)
  pour cut-out: 6469.32,4467.39 cw(c6466.83,4467.39) 6466.83,4464.89 cw(c6466.83,4467.39) 6464.34,4467.39 cw(c6466.83,4467.39) 6466.83,4469.88 cw(c6466.83,4467.39) 6469.32,4467.39 cw(c6092.51,4193.85)
  pour cut-out: 6490.2,4470.49 cw(c6487.71,4470.49) 6487.71,4467.99 cw(c6487.71,4470.49) 6485.21,4470.49 cw(c6487.71,4470.49) 6487.71,4472.98 cw(c6487.71,4470.49) 6490.2,4470.49 cw(c6095.61,4172.97)
  text ".AM_Title" at 6570.87,4547.24 h60 r90
  text "Rev. 1.1    03/2019" at 6614.17,4547.24 h60 r90
PCB Fab Notes:
  drawing of 347 lines, arcs and shapes, not listed
  text "Layer" at 7526.11,5945.87 h60
  text "Name" at 7936.02,5945.87 h60
  text "Material" at 8865.77,5945.87 h60
  text "Thickness" at 9725.54,5945.87 h60
  text "Constant" at 10375.37,5945.87 h60
  text "Board Layer Stack" at 10945.23,5945.87 h60
  text "1" at 7526.11,5825.87 h60
  text "Top Paste" at 7936.02,5825.87 h60
  text "2" at 7526.11,5705.87 h60
  text "Top Overlay" at 7936.02,5705.87 h60
  text "3" at 7526.11,5585.87 h60
  text "Top Solder" at 7936.02,5585.87 h60
  text "Solder Resist" at 8865.77,5585.87 h60
  text "0.010mm" at 9725.54,5585.87 h60
  text "3.5" at 10375.37,5585.87 h60
  text "4" at 7526.11,5465.87 h60
  text "Top Layer" at 7936.02,5465.87 h60
  text "Copper" at 8865.77,5465.87 h60
  text "0.035mm" at 9725.54,5465.87 h60
  text "5" at 7526.11,5345.87 h60
  text "Dielectric 1" at 7936.02,5345.87 h60
  text "7628MR" at 8865.77,5345.87 h60
  text "0.360mm" at 9725.54,5345.87 h60
  text "4.6" at 10375.37,5345.87 h60
  text "6" at 7526.11,5225.87 h60
  text "Power Layer" at 7936.02,5225.87 h60
  text "Copper" at 8865.77,5225.87 h60
  text "0.018mm" at 9725.54,5225.87 h60
  text "7" at 7526.11,5105.87 h60
  text "Dielectric 2" at 7936.02,5105.87 h60
  text "FR+4" at 8865.77,5105.87 h60
  text "0.710mm" at 9725.54,5105.87 h60
  text "4.3" at 10375.37,5105.87 h60
  text "8" at 7526.11,4985.87 h60
  text "GND Layer" at 7936.02,4985.87 h60
  text "Copper" at 8865.77,4985.87 h60
  text "0.018mm" at 9725.54,4985.87 h60
  text "9" at 7526.11,4865.87 h60
  text "Dielectric 3" at 7936.02,4865.87 h60
  text "7628MR" at 8865.77,4865.87 h60
  text "0.360mm" at 9725.54,4865.87 h60
  text "4.6" at 10375.37,4865.87 h60
  text "10" at 7526.11,4745.87 h60
  text "Bottom Layer" at 7936.02,4745.87 h60
  text "Copper" at 8865.77,4745.87 h60
  text "0.035mm" at 9725.54,4745.87 h60
  text "11" at 7526.11,4625.87 h60
  text "Bottom Solder" at 7936.02,4625.87 h60
  text "Solder Resist" at 8865.77,4625.87 h60
  text "0.010mm" at 9725.54,4625.87 h60
  text "3.5" at 10375.37,4625.87 h60
  text "12" at 7526.11,4505.87 h60
  text "Bottom Overlay" at 7936.02,4505.87 h60
  text "13" at 7526.11,4385.87 h60
  text "Bottom Paste" at 7936.02,4385.87 h60
  text "Stackup optimized for production at Eurocircuits" at 7483.27,4248.03 h60
Outline:
  the board outline again, w7.87
Top Body:
  the board outline again, w7.87

## Text inside footprints (layer, text, board x,y; h text height)
J1: Top Courtyard "PCB Edge" at 5078.35,4683.62 h39.37 r270
J2: Mechanical 1 "J1" at 6132.2,4655.63 h30 r90